# Altium PCB parinaz_jalalian.PcbDoc
Units mm, origin at the board's own origin, x right, y up, seen from the top; angles counter-clockwise.
Board outline 95.25 x 52.32 mm, 2 copper layers (Top Layer, Bottom Layer); 28 components, 23 nets, 114 pads, 18 vias.
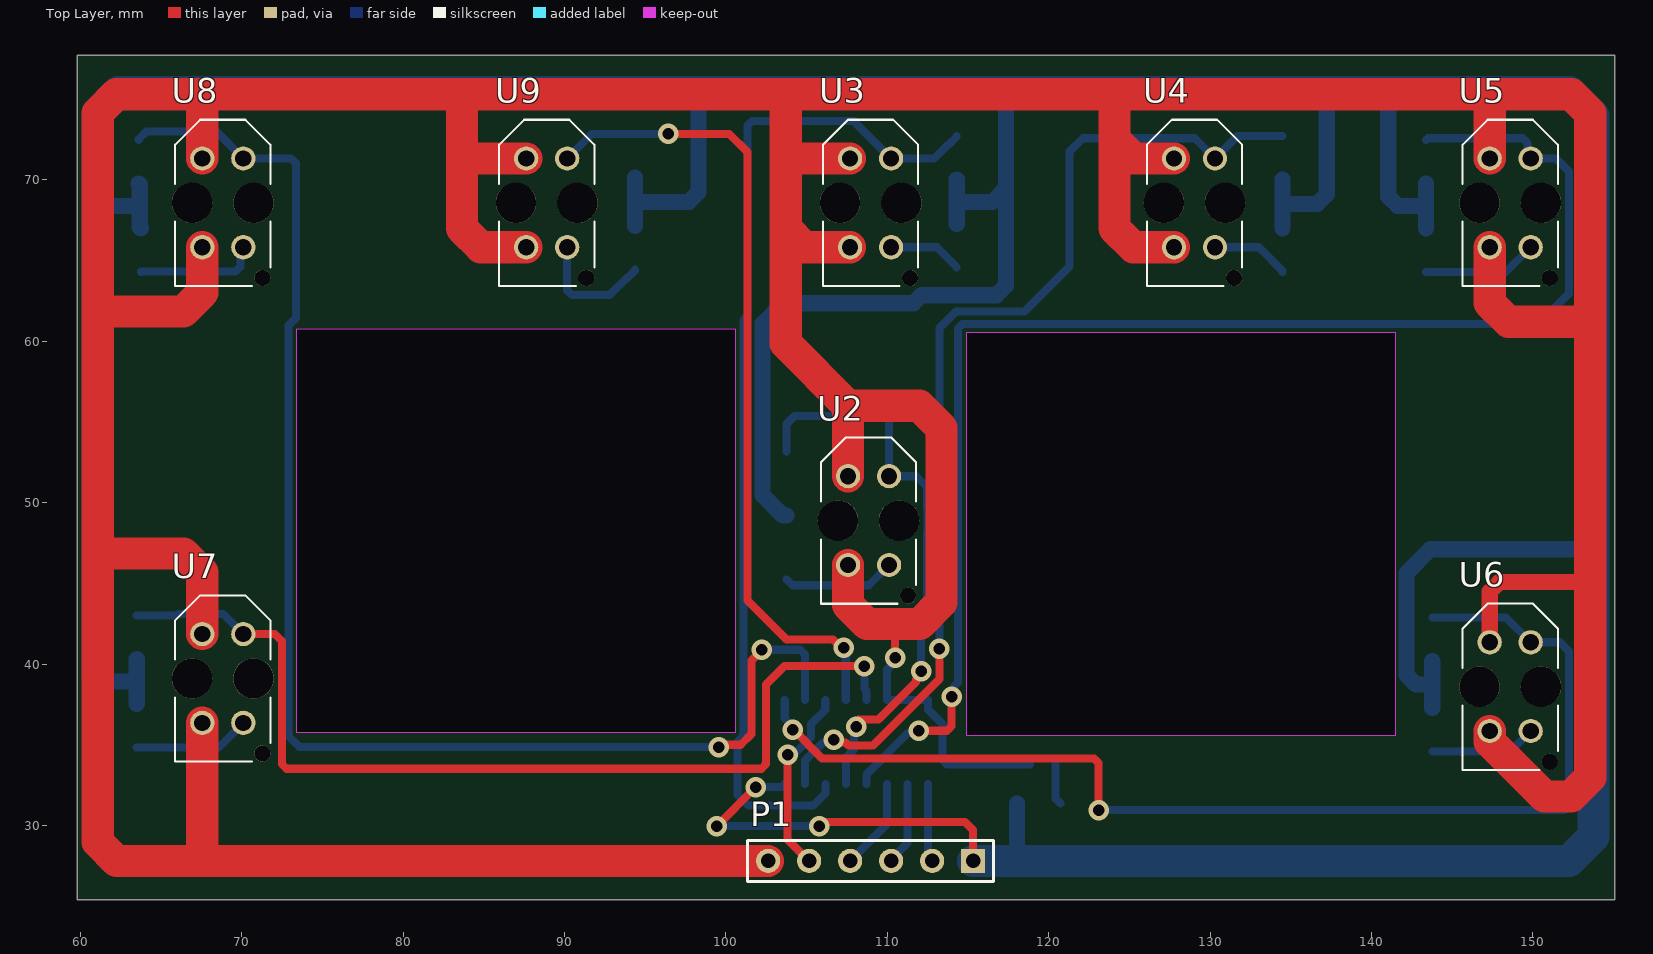
[diagram p0: Top Layer view]
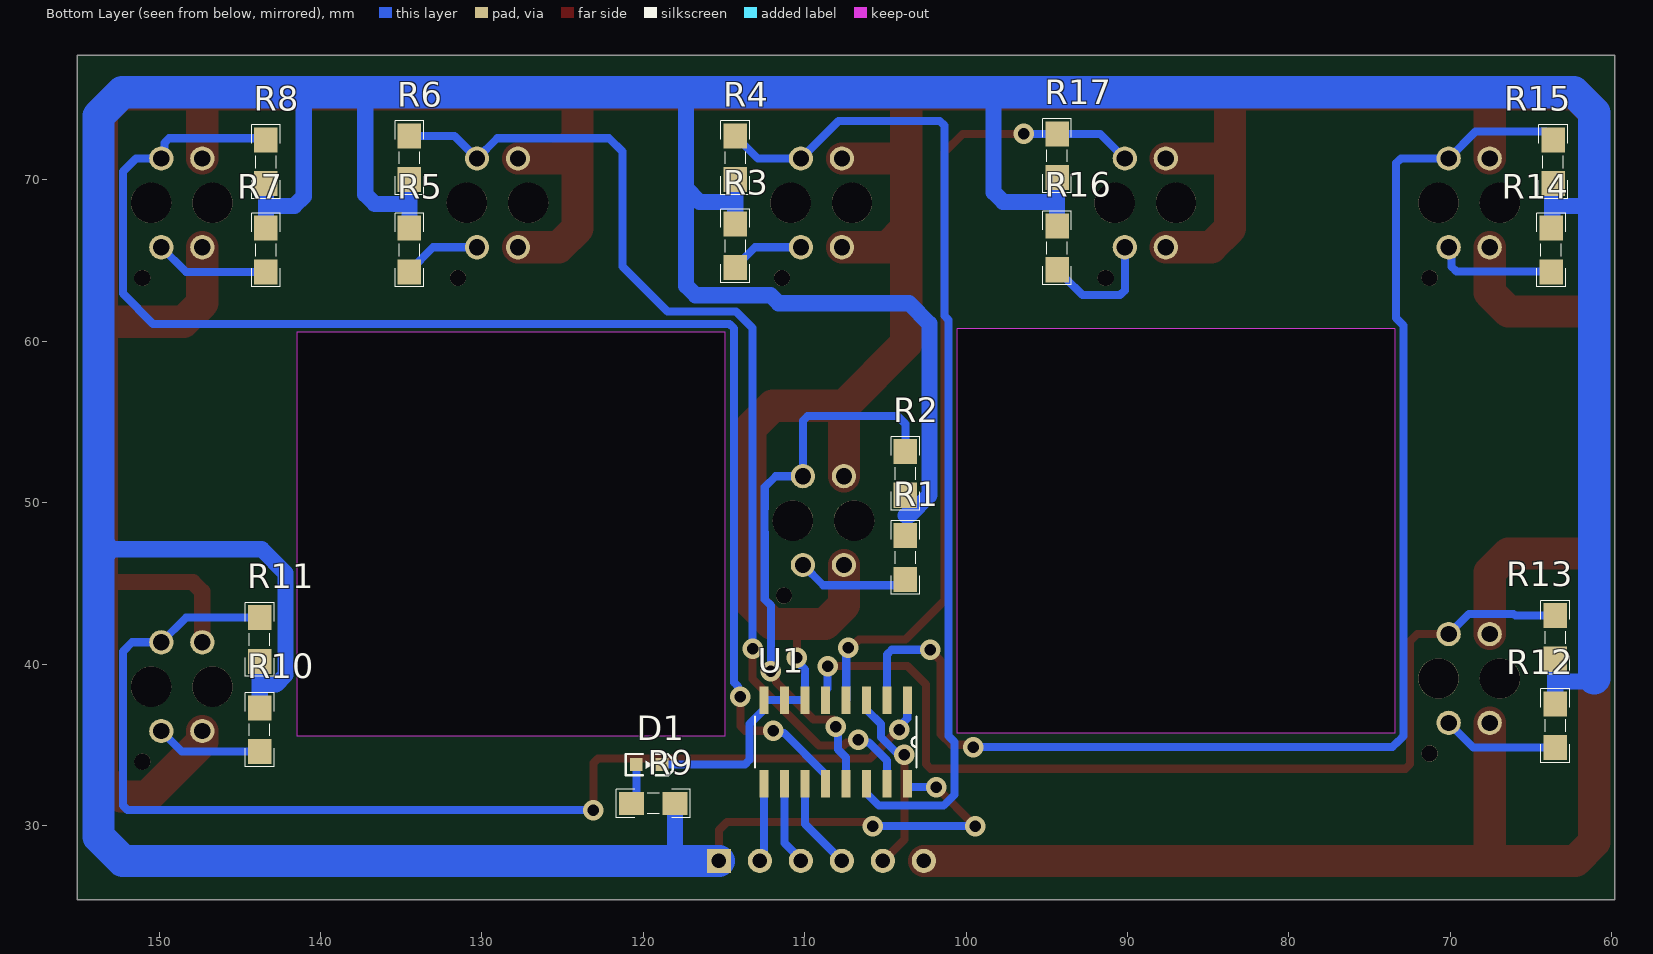
[diagram p1: Bottom Layer view, seen from below]
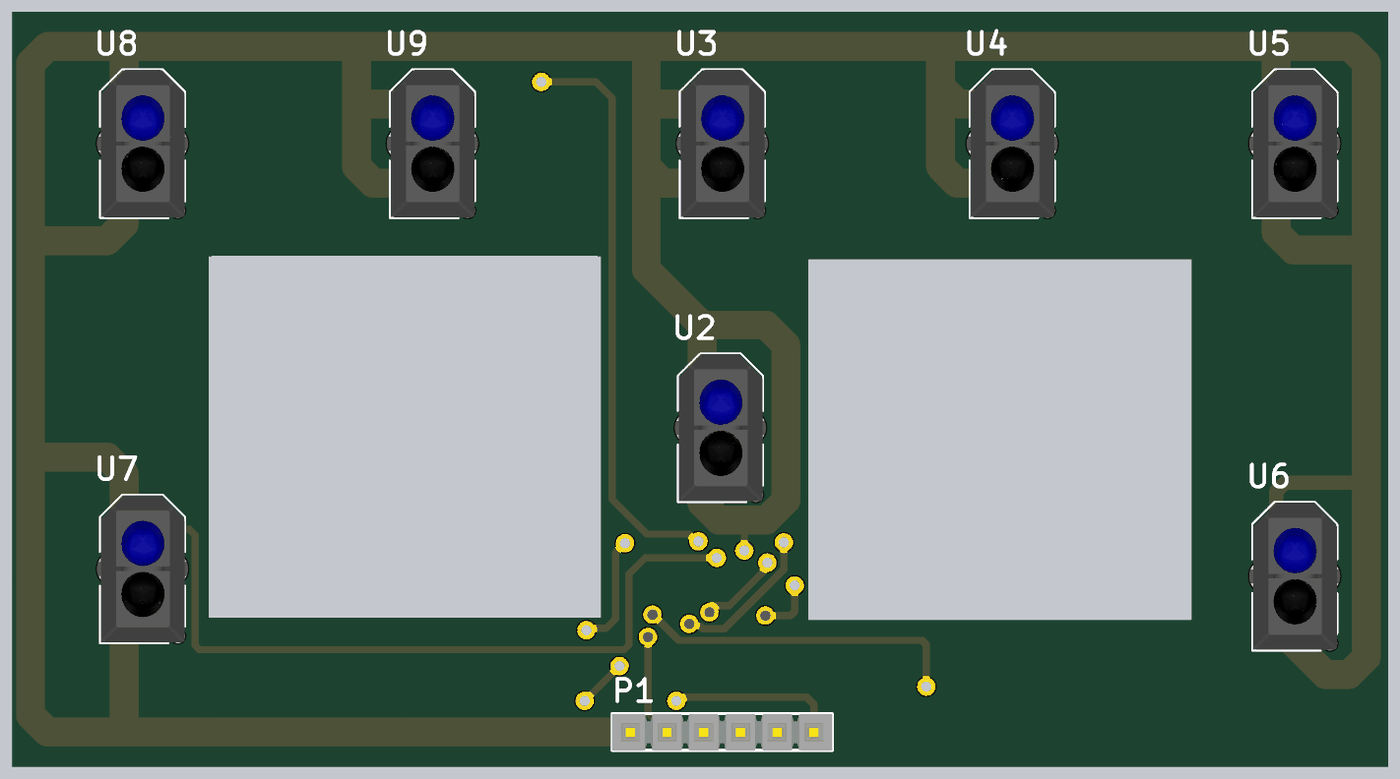
[diagram p2: 3D render of the assembled board from above, using the file's embedded part models]
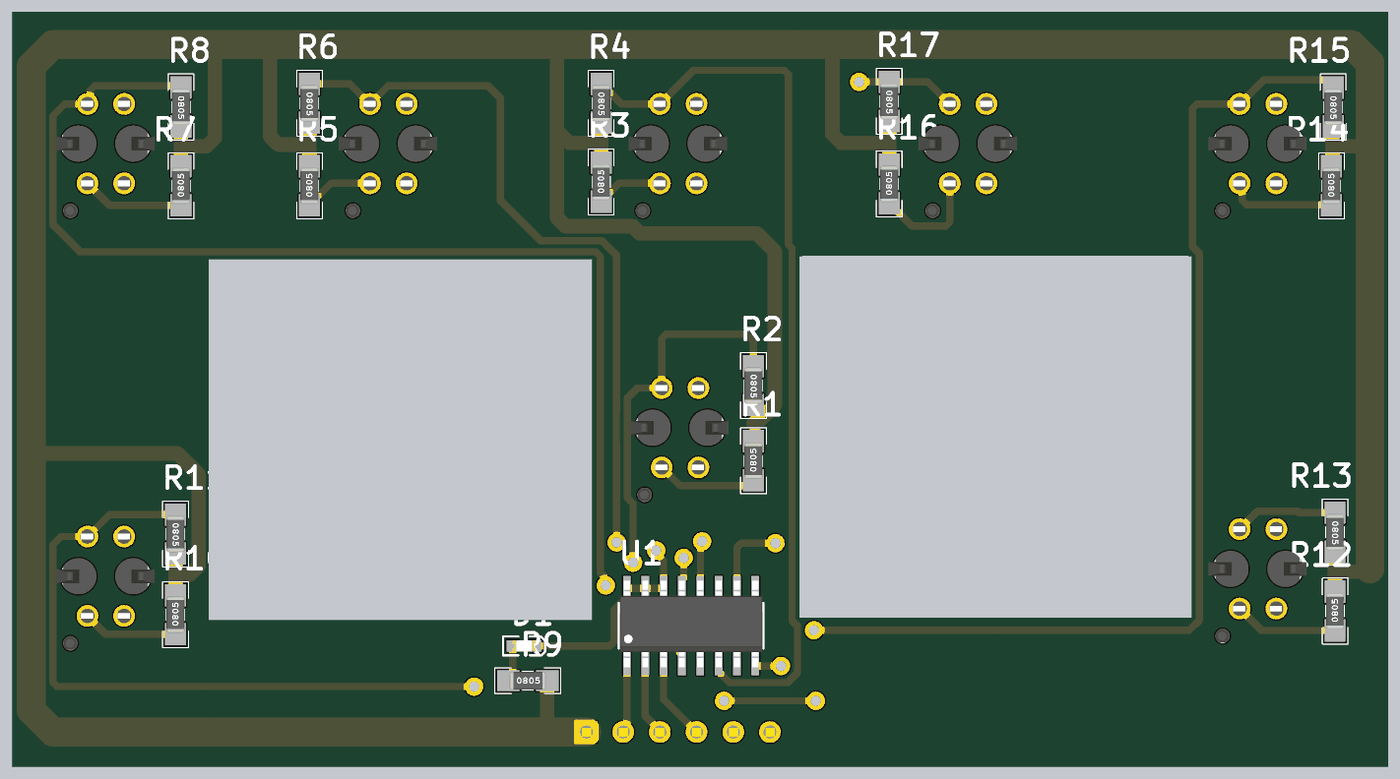
[diagram p3: 3D render of the assembled board from below, using the file's embedded part models]

## Layer stack, top to bottom
Top Solder: solder mask 0.0102, Solder Resist, Dk 3.5
Top Layer: signal copper 0.0356
Dielectric 1: dielectric 0.32, FR-4, Dk 4.8
Bottom Layer: signal copper 0.0356
Bottom Solder: solder mask 0.0102, Solder Resist, Dk 3.5

## Board outline
59.817,25.4 155.067,25.4 155.067,77.724 59.817,77.724
cut-out: 114.935,60.579 141.478,60.579 141.478,35.56 114.935,35.56
cut-out: 73.406,60.77 100.584,60.77 100.584,35.75 73.406,35.75

## Design rules (kind name [scope] priority, off if disabled: settings)
Clearance [All] p1: gap=0.254 ignorepadtopadclearanceinfootprint=FALSE except(0: Arc-Hole Track-Hole SMDPad-Hole THPad-Hole Via-Hole Fill-Hole Poly-Hole Region-Hole Text-Hole)
PolygonConnect [All] p1: connectstyle=Relief reliefconductorwidth=0.254 reliefentries=4 polygonreliefangle="90 Angle" airgapwidth=0.254
RoutingVias [All] p1: holewidth=0.711 width=1.27 viastyle="Through Hole" minholewidth=0.711 minwidth=1.27 maxholewidth=0.711 maxwidth=1.27
SolderMaskExpansion [All] p1: expansion=0.102 istentingtop=FALSE
Width [All] p1: maxlimit=2 minlimit=0.5 preferedwidth=1
30 further rules are at their usual default settings.

## Components (designator, comment, footprint, x,y, rotation, side; value= is the part's Value field where it differs from the comment)
D1 "LED SMD PACKAGE" LED_SMD_0603 119.634,33.782 r0 bottom
P1 "Header 6" HDR1X6 115.316,27.813 r180 top
R1 "1K" RESC3413X04N 103.759,46.609 r90 bottom
R2 "1K" RESC3413X04N 103.759,51.816 r270 bottom
R3 "1K" RESC3413X04N 114.3,65.913 r90 bottom
R4 "1K" RESC3413X04N 114.3,71.374 r270 bottom
R5 "1K" RESC3413X04N 134.493,65.659 r90 bottom
R6 "1K" RESC3413X04N 134.493,71.374 r270 bottom
R7 "1K" RESC3413X04N 143.383,65.659 r90 bottom
R8 "1K" RESC3413X04N 143.383,71.12 r270 bottom
R9 "1K" RESC3413X04N 119.38,31.369 r180 bottom
R10 "1K" RESC3413X04N 143.764,35.941 r90 bottom
R11 "1K" RESC3413X04N 143.764,41.529 r270 bottom
R12 "1K" RESC3413X04N 63.5,36.195 r90 bottom
R13 "1K" RESC3413X04N 63.5,41.656 r270 bottom
R14 "1K" RESC3413X04N 63.754,65.659 r90 bottom
R15 "1K" RESC3413X04N 63.627,71.12 r270 bottom
R16 "1K" RESC3413X04N 94.361,65.786 r90 bottom
R17 "1K" RESC3413X04N 94.361,71.501 r270 bottom
U1 "74HC4051D" SOIC127P600X175-16N 108.077,35.179 r270 bottom
U2 "TCRT5000" OPTO_TCRT5000 108.839,48.895 r90 top
U3 "TCRT5000" OPTO_TCRT5000 108.966,68.58 r90 top
U4 "TCRT5000" OPTO_TCRT5000 129.032,68.58 r90 top
U5 "TCRT5000" OPTO_TCRT5000 148.59,68.58 r90 top
U6 "TCRT5000" OPTO_TCRT5000 148.59,38.608 r90 top
U7 "TCRT5000" OPTO_TCRT5000 68.834,39.116 r90 top
U8 "TCRT5000" OPTO_TCRT5000 68.834,68.58 r90 top
U9 "TCRT5000" OPTO_TCRT5000 88.9,68.58 r90 top

## Footprints (in the part's own frame and the unit in brackets; to place one, negate y for a bottom-side part, rotate by r counter-clockwise, add the part's x,y. Pads: shape width x height; smd on the part's side, far side on the other; paste and mask are expansions set on the pad)
HDR1X6 [mm] "Connector; Header; 6 Position"
  rect 1.5x1.5 hole 0.9: 1(0,0)
  round 1.5 hole 0.9: 2(2.54,0) 3(5.08,0) 4(7.62,0) 5(10.16,0) 6(12.7,0)
  silkscreen extent -1.27,-1.27 13.97,1.27, body extent -1.26,-1.25 13.98,1.29, height 8.38
LED_SMD_0603 [mm] "SMD Mono-color Chip LED, body 1.6x0.8mm"
  rect 0.8x0.8 smd: 1(-0.8,0) 2(0.8,0)
  silkscreen extent -1.45,-0.65 1.45,0.65, body extent -0.8,-0.4 0.8,0.4, height 0.7
OPTO_TCRT5000 [mm]
  round 1.5 hole 1: A(2.75,1.27) CATH(2.75,-1.27) COLL(-2.75,1.27) E(-2.75,-1.27)
  round 1 hole 1 unplated: ""(-4.65,-2.45)
  round 2.5 hole 2.5 unplated: ""(0,1.9) ""(0,-1.9)
  silkscreen extent -5.15,-2.95 5.15,2.95, body extent -5.1,-3.43 5.1,3.37, height 7.2
RESC3413X04N [mm] "Chip Resistor, 2-Leads, Body 3/40x1/30mm, IPC Medium Density-Design:Abbas Basereh"
  rect 1.55x1.45 smd: 1(-1.35,0) 2(1.35,0)
  silkscreen extent -2.29,-0.89 2.29,0.89, body extent -1.25,-0.62 1.25,0.62, height 0.79
SOIC127P600X175-16N [mil]
  rect 67x21 smd: 1(-102,175) 2(-102,125) 3(-102,75) 4(-102,25) 5(-102,-25) 6(-102,-75) 7(-102,-125) 8(-102,-175) 9(102,-175) 10(102,-125) 11(102,-75) 12(102,-25) 13(102,25) 14(102,75) 15(102,125) 16(102,175)
  silkscreen extent -62,-197 62,197, body extent -123,-195 113,195, height 69

## Part data
D1: "SMD Mono-color Chip LED Waterclear", Forward Voltage="3.2 V", Part Number=150080BS75000, Peak Wavelength="465 nm", Published Date="Jan 2017", Publisher="Ali Hafizi"
P1: "Header, 6-Pin", LatestRevisionDate=17-Jul-2002, LatestRevisionNote="Re-released for DXP Platform.", Publisher="Altium Limited"
R1 R2 R3 R4 R5 R6 R7 R8 R9 R10 R11 R12 R13 R14 R15 R16 R17: library part "RES 0805 0.125W", "RES 0805", Data=16-12-2016, Desc.="RES SMD 0805", Designer="Abbas Basereh"
U1: "1 Circuit IC Switch 8:1 130Ohm 16-SOIC", Package="SOIC-16 Toshiba", Availability="In Stock", Check_prices=https://www.snapeda.com/parts/74HC4051D/Toshiba/view-part/?ref=eda, MF=Toshiba, MP=74HC4051D, Price=None, Purchase-URL=https://pricing.snapeda.com/search/part/74HC4051D/?ref=eda, SnapEDA_Link=https://www.snapeda.com/parts/74HC4051D/Toshiba/view-part/?ref=snap
U2 U3 U4 U5 U6 U7 U8 U9: "950 nm 60 mA Through Hole Reflective Optical Sensor with Transistor Output", Package=None, Availability=Unavailable, MP=TCRT5000, Price=None

## Via types
v1: diameter 1.27, hole 0.711, Top Layer to Bottom Layer, 18 vias

## Nets (pads, with @x,y where several pads share a name; then routed paths per layer and width w, separated by ;. In a path a pad name is that pad's centre, name@x,y a point inside that pad or via, vN(x,y) a via of type N, cw(c..) or ccw(c..) an arc to the next point about the centre after c; other vN are vias at no path point)
+5: P1.1 R1.2 R2.2 R3.2 R4.2 R5.2 R6.2 R7.2 R8.2 R9.2 R10.2 R11.2 R12.2 R13.2 R14.2 R15.2 R16.2 R17.2 U1.16 | length 358.4
  Top Layer w0.5: v1(99.441,29.972) v1(101.854,32.385) ; v1(105.791,29.972) 105.791,30.226 114.808,30.226 115.316,29.718 P1.1
  Bottom Layer w0.5: v1@99.314,30.099 v1(99.441,29.972) v1(105.791,29.972) ; v1(101.854,32.385) 103.615,32.385 103.632,32.402 U1.16
  Bottom Layer w1: 61.087,39.116 61.277,38.925 63.5,38.925 ; 61.087,68.58 61.277,68.389 63.691,68.389 ; R12.2 63.5,38.925 ; R13.2 63.5,38.925 ; R15.2 63.691,69.707 63.691,68.389 ; R14.2 63.691,67.072 63.691,68.389 ; R16.2 94.361,68.644 ; R17.2 94.361,68.644 ; 98.298,75.438 98.298,69.229 97.712,68.644 94.361,68.644 ; 103.759,49.212 103.534,49.212 102.28,50.466 102.28,61.103 103.534,62.357 111.616,62.357 112.112,62.853 116.762,62.853 117.348,63.439 117.348,69.469 ; R3.2 114.3,68.644 ; R4.2 114.3,68.644 ; 117.348,75.438 117.348,69.469 ; 117.983,27.813 118.03,27.86 R9.2 ; R5.2 134.493,68.516 ; R6.2 134.493,68.516 ; 137.16,75.438 137.224,75.374 137.224,69.102 136.638,68.516 134.493,68.516 ; 141.097,75.438 141.034,75.374 141.034,68.975 141.619,68.389 143.383,68.389 ; R7.2 143.383,68.389 ; R8.2 143.383,68.389 ; R10.2 143.764,38.735 ; R11.2 143.764,38.735 ; 153.543,47.117 143.637,47.117 142.169,45.649 142.169,39.321 142.754,38.735 143.764,38.735 ; 114.3,68.644 116.522,68.644 117.348,69.469
  Bottom Layer w2: 61.087,39.116 61.087,68.58 61.087,74.168 62.357,75.438 98.298,75.438 117.348,75.438 137.16,75.438 141.097,75.438 152.273,75.438 153.748,73.963 153.748,46.912 ; P1.1 117.983,27.813 152.244,27.813 153.748,29.317 153.748,46.912 ; 153.543,47.117 153.748,46.912
GND: D1.1 P1.6 U1.6 U1.7 U1.8 U2.A U2.COLL U3.A U3.COLL U4.A U4.COLL U5.A U5.COLL U6.A U6.COLL U7.A U7.COLL U8.A U8.COLL U9.A U9.COLL | length 398.5
  Top Layer w0.5: v1(110.49,40.386) 110.49,42.491
  Top Layer w1: U6.A 147.32,44.499 147.906,45.085 153.543,45.085
  Top Layer w2: U7.COLL 67.564,28.067 67.31,27.813 ; U7.A 67.564,45.691 66.392,46.863 61.087,46.863 ; U8.COLL 67.564,63.021 66.392,61.849 61.214,61.849 61.087,61.722 ; U8.A 67.564,75.184 67.691,75.311 ; U9.COLL 84.821,65.83 83.649,67.002 83.649,71.501 ; U9.A 83.82,71.33 83.649,71.501 ; P1.6 67.31,27.813 ; U2.COLL 107.569,43.663 108.741,42.491 110.49,42.491 112.016,42.491 113.363,43.839 113.363,54.629 111.985,56.007 107.569,56.007 ; U2.A 107.569,56.007 ; U3.COLL 104.887,65.83 103.715,67.002 ; U3.A 103.798,71.33 103.715,71.247 ; U4.COLL 125.251,65.83 124.079,67.002 124.079,72.502 ; U4.A 125.251,71.33 124.079,72.502 ; U6.COLL 147.32,35.197 150.715,31.803 152.371,31.803 153.543,32.974 153.543,45.085 153.543,61.214 ; U5.COLL 147.32,62.386 148.492,61.214 153.543,61.214 ; U5.A 147.32,75.184 147.193,75.311 ; 61.087,46.863 61.087,61.722 ; 61.087,46.863 61.087,28.985 62.259,27.813 67.31,27.813 ; 61.087,61.722 61.087,74.139 62.259,75.311 67.691,75.311 ; 67.691,75.311 83.693,75.311 ; 83.649,71.501 83.649,75.267 83.693,75.311 ; 83.693,75.311 103.632,75.311 ; 103.632,75.311 124.079,75.311 ; 103.632,75.311 103.715,75.228 103.715,71.247 ; 103.715,67.002 103.715,59.861 107.569,56.007 ; 103.715,67.002 103.715,71.247 ; 124.079,72.502 124.079,75.311 ; 124.079,75.311 147.193,75.311 ; 147.193,75.311 152.371,75.311 153.543,74.139 153.543,61.214
  Bottom Layer w0.5: v1(110.49,40.386) 110.49,40.178 109.982,39.67 U1.6 U1.7 U1.8 112.522,37.186 113.411,36.297 113.411,34.075 113.704,33.782 D1.1
NetD1_2: D1.2 R9.1 | length 2.5
  Bottom Layer w0.5: D1.2 120.434,31.665 R9.1
NetR1_1: R1.1 U2.E | length 7
  Bottom Layer w0.5: R1.1 104.127,44.891 108.855,44.891 U2.E
NetR3_1: R3.1 U3.E | length 4.6
  Bottom Layer w0.5: U3.E 113.083,65.83 114.3,64.613 R3.1
NetR5_1: R5.1 U4.E | length 4.9
  Bottom Layer w0.5: U4.E 133.022,65.83 134.493,64.359 R5.1
NetR7_1: R7.1 U5.E | length 7.1
  Bottom Layer w0.5: R7.1 148.339,64.309 U5.E
NetR10_1: R10.1 U6.E | length 6.6
  Bottom Layer w0.5: R10.1 148.593,34.591 U6.E
NetR12_1: R12.1 U7.E | length 7.2
  Bottom Layer w0.5: R12.1 68.583,34.845 U7.E
NetR14_1: R14.1 U8.E | length 7.6
  Bottom Layer w0.5: R14.1 63.775,64.33 69.625,64.33 69.918,64.623 69.918,65.644 U8.E
NetR16_1: R16.1 U9.E | length 7.7
  Bottom Layer w0.5: U9.E 90.17,63.158 90.463,62.865 92.79,62.865 93.836,63.911 93.886,63.911 94.361,64.386 R16.1
OUT: P1.5 U1.3 | length 11.7
  Top Layer w0.5: v1(103.822,34.397) 103.822,29.147 P1.5
  Bottom Layer w0.5: v1(103.822,34.397) 103.969,34.544 104.344,34.544 105.274,35.474 105.274,36.288 106.155,37.169 106.155,37.753 U1.3
S0: P1.4 U1.11 | length 5.7
  Bottom Layer w0.5: P1.4 109.982,30.099 U1.11
S1: P1.3 U1.10 | length 5.2
  Bottom Layer w0.5: P1.3 110.236,27.902 111.252,28.918 U1.10
S2: P1.2 U1.9 | length 4.9
  Bottom Layer w0.5: U1.9 112.522,28.338 112.776,28.084 P1.2
Y1: R2.1 U1.13 U2.CATH | length 35.7
  Top Layer w0.5: v1(108.077,36.11) 108.204,36.237 108.204,36.568 109.466,36.568 111.789,38.891 111.789,39.039 112.09,39.34 v1(112.09,39.548)
  Bottom Layer w0.5: R2.1 103.759,54.886 104.245,55.372 109.816,55.372 110.109,55.079 U2.CATH 111.797,51.645 112.475,50.967 112.475,49.64 112.493,49.622 112.493,48.168 112.475,48.15 112.475,44.011 112.09,43.626 v1(112.09,39.548) ; U1.13 107.442,34.228 107.939,34.725 107.939,35.972 v1(108.077,36.11)
Y2: R4.1 U1.14 U3.CATH | length 63
  Bottom Layer w0.5: U1.14 106.172,32.004 105.401,31.233 101.395,31.233 100.715,31.913 100.715,35.169 101.088,35.542 101.088,61.331 101.342,61.585 101.342,73.367 101.635,73.66 107.906,73.66 U3.CATH 112.906,71.33 113.775,72.199 113.825,72.199 114.3,72.674 R4.1
Y3: R6.1 U1.15 U4.CATH | length 65.3
  Top Layer w0.5: v1(106.68,35.306) 106.827,35.159 107.417,35.159 107.605,34.971 109.123,34.971 113.229,39.077 v1(113.229,40.949)
  Bottom Layer w0.5: U1.15 104.902,34.036 106.025,35.159 106.533,35.159 v1(106.68,35.306) ; v1(113.229,40.949) 113.229,47.838 113.247,47.856 113.247,49.934 113.229,49.952 113.229,60.828 114.25,61.849 118.491,61.849 121.285,64.643 121.285,71.755 122.114,72.584 129.048,72.584 U4.CATH 131.696,72.724 R6.1
Y4: R8.1 U1.12 U5.CATH | length 87.7
  Top Layer w0.5: v1(111.95,35.877) 113.69,35.877 113.983,36.17 v1(113.983,37.973)
  Bottom Layer w0.5: U1.12 108.712,33.172 111.27,35.73 111.803,35.73 v1(111.95,35.877) ; 114.13,38.625 114.368,38.863 114.368,60.788 114.663,61.083 150.364,61.083 152.244,62.963 152.244,70.514 151.428,71.33 U5.CATH 149.669,71.521 149.669,72.288 149.373,72.584 143.497,72.584 R8.1
Y5: R11.1 U1.1 U6.CATH | length 72.9
  Top Layer w0.5: v1(104.135,35.946) 104.18,35.946 105.959,34.167 122.799,34.167 123.092,33.874 v1(123.092,30.959)
  Bottom Layer w0.5: U1.1 103.649,37.753 103.649,36.641 104.135,36.154 v1(104.135,35.946) ; v1(123.092,30.959) 151.951,30.959 152.244,31.252 152.244,40.796 151.682,41.358 U6.CATH 148.339,42.879 R11.1
Y6: R13.1 U1.5 U7.CATH | length 61.2
  Top Layer w0.5: U7.CATH 72.053,41.866 72.488,41.431 72.488,33.817 72.781,33.524 102.202,33.524 102.495,33.817 102.495,38.741 103.632,39.878 v1(108.585,39.878)
  Bottom Layer w0.5: R13.1 65.972,43.006 66.086,43.12 68.85,43.12 U7.CATH ; v1(108.585,39.878) 108.585,38.481 108.712,38.354 U1.5
Y7: R15.1 U1.2 U8.CATH | length 87.2
  Top Layer w0.5: v1(99.568,34.861) 99.715,35.009 100.922,35.009 101.578,35.665 101.578,40.237 v1(102.235,40.894)
  Bottom Layer w0.5: R15.1 63.627,72.52 64.102,72.995 68.439,72.995 U8.CATH 73.069,71.33 73.362,71.037 73.362,61.438 72.902,60.978 72.902,35.542 73.197,35.247 73.211,35.247 73.596,34.861 v1(99.568,34.861) v1@99.758,34.861 ; v1(102.235,40.894) 102.362,40.767 102.489,40.894 104.609,40.894 104.902,40.601 U1.2
Y8: R17.1 U1.4 U9.CATH | length 50.5
  Top Layer w0.5: v1(96.44,72.851) 100.211,72.851 101.342,71.72 101.342,43.946 103.759,41.529 106.637,41.529 107.145,41.021 v1(107.315,41.021)
  Bottom Layer w0.5: U9.CATH 91.691,72.851 R17.1 v1(96.44,72.851) ; v1(107.315,41.021) 107.425,40.911 107.425,37.787 U1.4
pads on no net: U2. U3. U4. U5. U6. U7. U8. U9.

## Silkscreen, mask and mechanical layers (free items; w line width, h text height)
Mechanical 1:
  lines w0.254: 68.834,39.116 68.834,68.58 88.9,68.58 108.966,68.58 ; 108.966,48.514 108.966,68.58 ; 148.59,38.608 148.59,68.58 129.032,68.58 108.966,68.58